# Altium PCB ESP32-S3-WROOM-1-BREAKOUT.PcbDoc
Units mm, origin at the board's own origin, x right, y up, seen from the top; angles counter-clockwise.
Board outline 25.46 x 50.86 mm, 2 copper layers (Top Layer, Bottom Layer), stack 1.57 mm thick; 17 components, 46 nets, 132 pads, 79 vias.
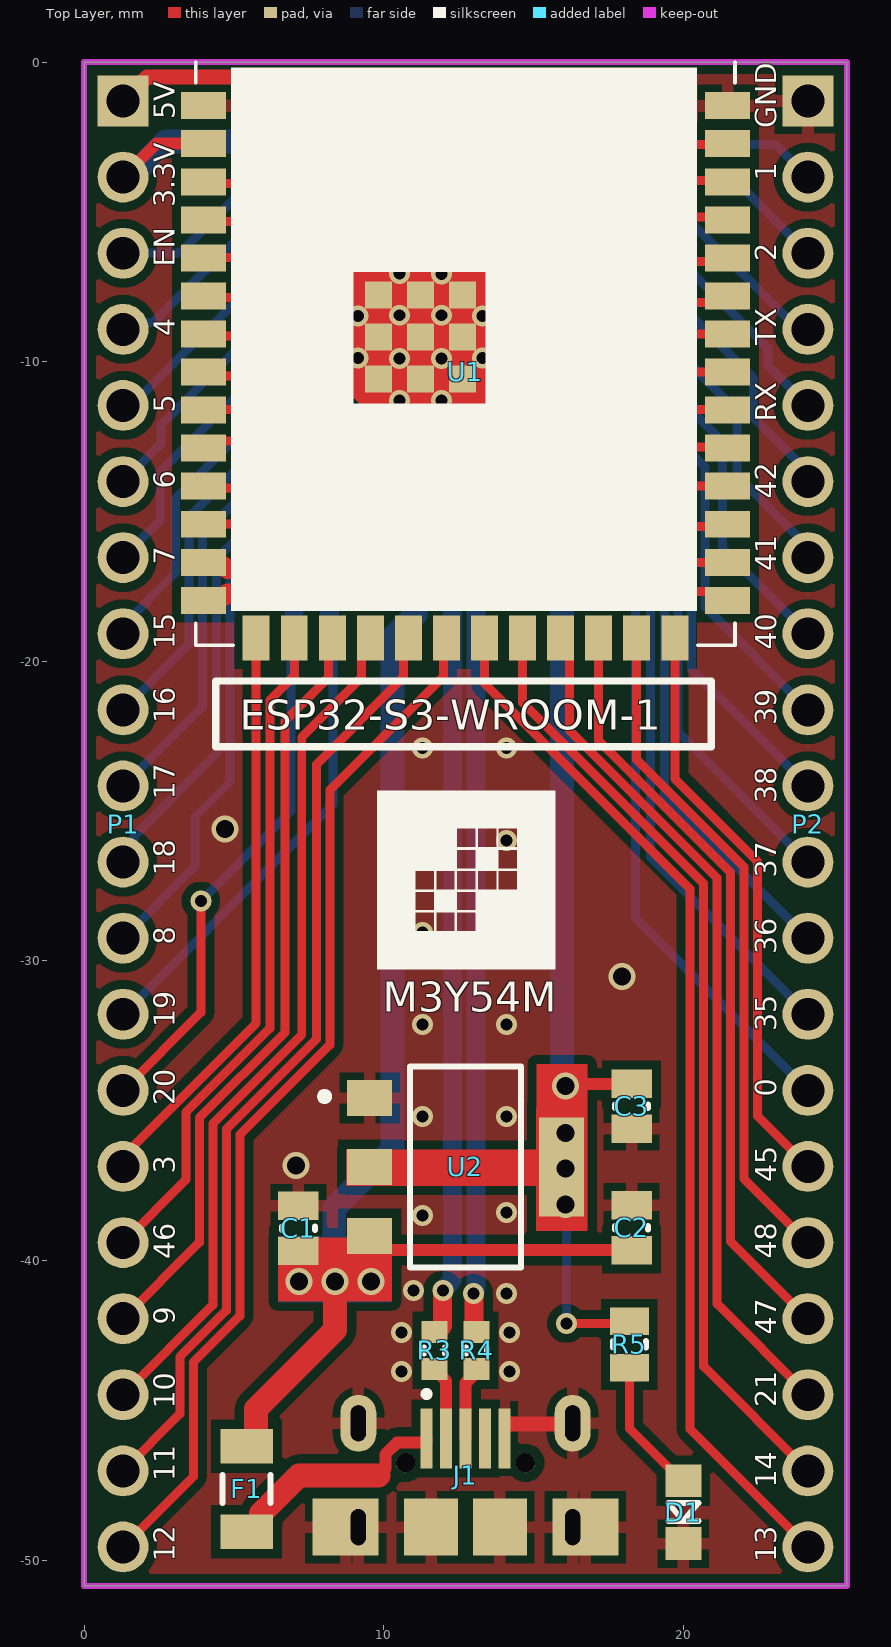
[diagram p0: Top Layer view]
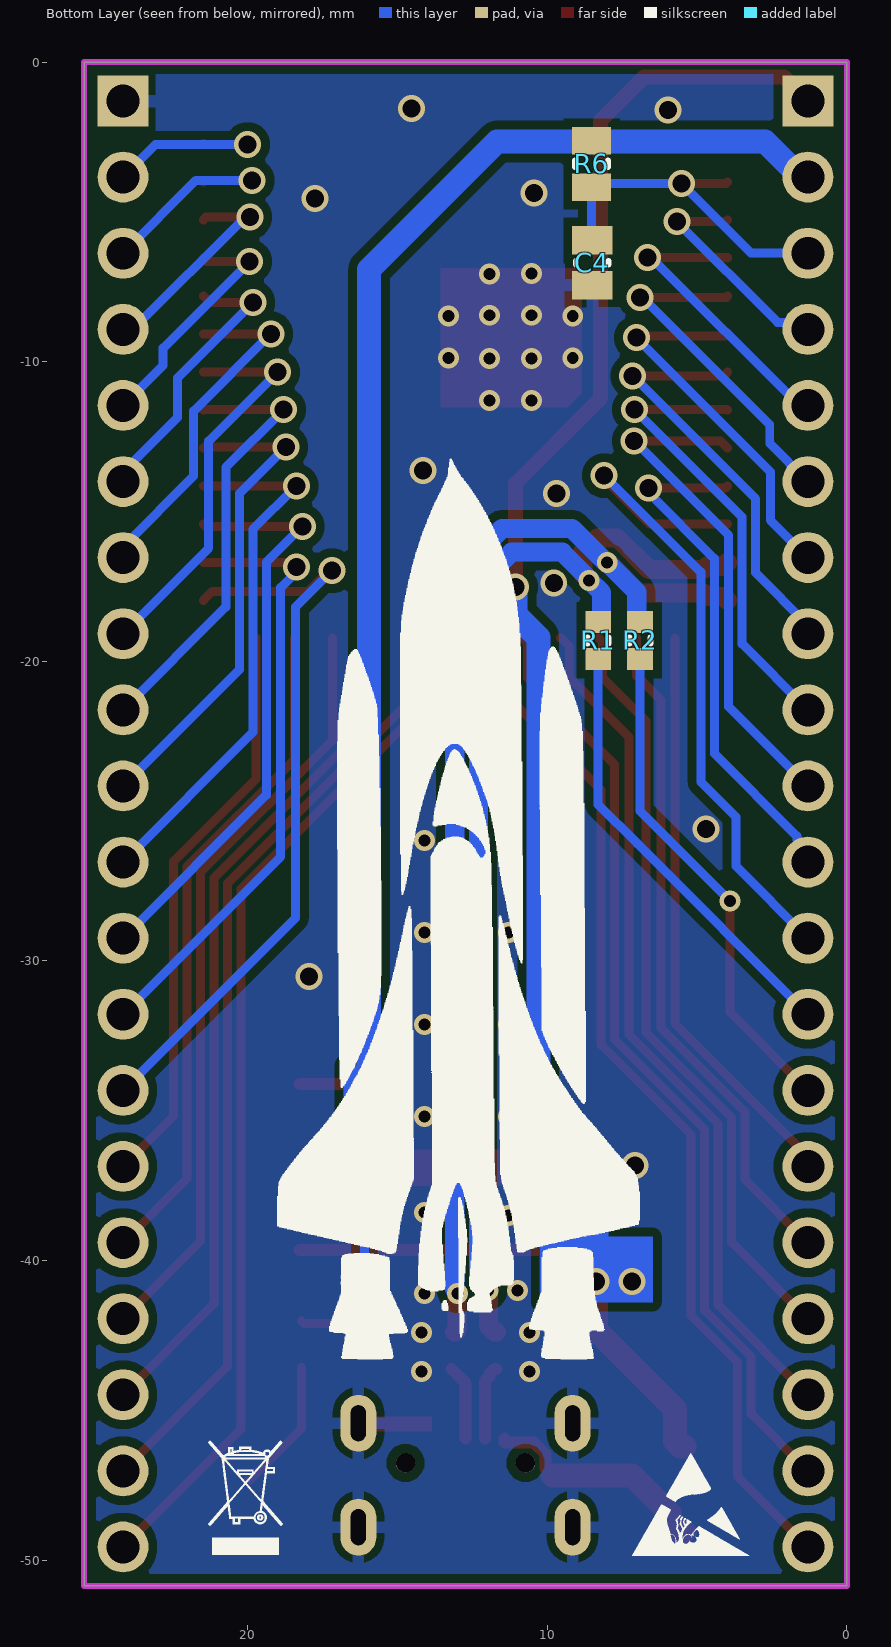
[diagram p1: Bottom Layer view, seen from below]
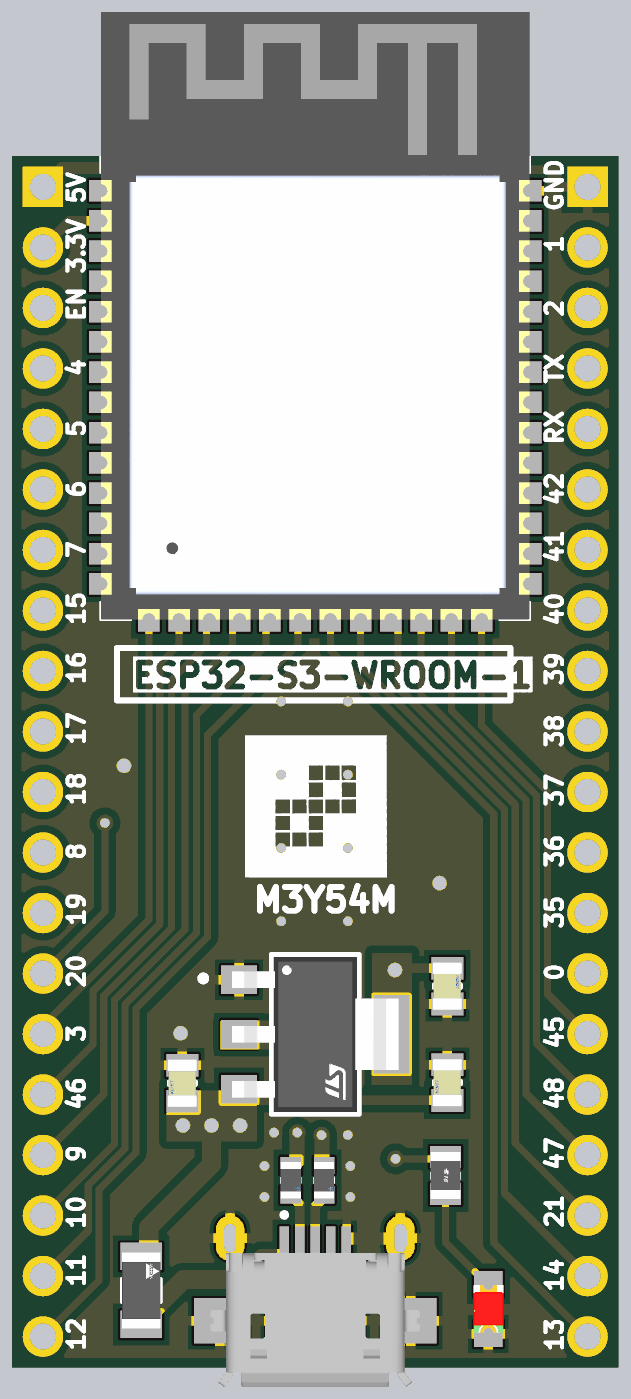
[diagram p2: 3D render of the assembled board from above, using the file's embedded part models]
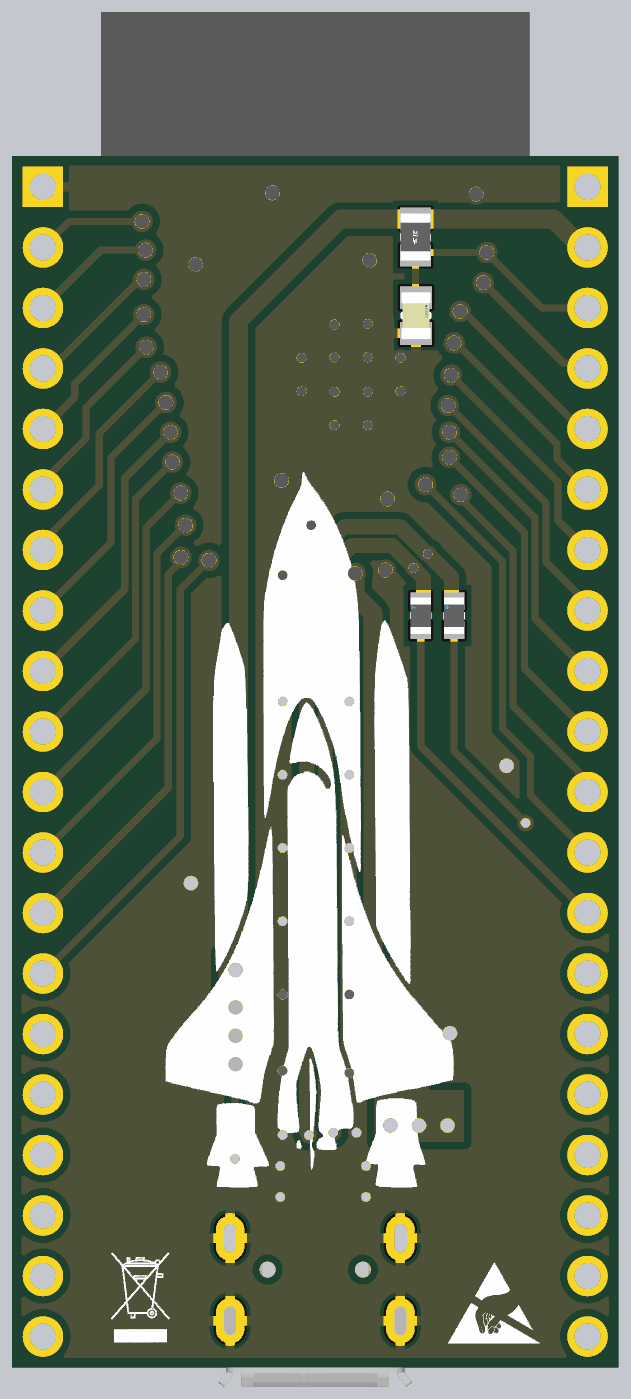
[diagram p3: 3D render of the assembled board from below, using the file's embedded part models]

## Layer stack, top to bottom
Top Solder: solder mask 0.01, Solder Resist, Dk 3.5
Top Layer: signal copper 0.035
Dielectric 1: dielectric 1.5, FR-4, Dk 4.2
Bottom Layer: signal copper 0.035
Bottom Solder: solder mask 0.01, Solder Resist, Dk 3.5

## Board outline
0,-50.86 25.46,-50.86 25.46,0 0,0

## Design rules (kind name [scope] priority, off if disabled: settings)
BoardOutlineClearance [All] p1: gap=0.2 ignorepadtopadclearanceinfootprint=FALSE
Clearance Clearance_Polygon_Fiducials [All vs InComponent('FID?')] p1: gap=1.3 ignorepadtopadclearanceinfootprint=TRUE
Clearance Clearance_Polygon [InPolygon] p2: gap=0.3 ignorepadtopadclearanceinfootprint=TRUE
Clearance [All] p3: gap=0.15 ignorepadtopadclearanceinfootprint=TRUE except(0: Arc-Hole Track-Hole SMDPad-Hole THPad-Hole Via-Hole Fill-Hole Poly-Hole Region-Hole Text-Hole)
DiffPairsRouting [InDifferentialPairClass('USB')] p1: maxlimit=0.15 minlimit=0.15 mostfreqgap=0.15 toplayer_minwidth=0.4 toplayer_maxwidth=0.637 toplayer_prefwidth=0.637 bottomlayer_minwidth=0.4 bottomlayer_maxwidth=0.637 bottomlayer_prefwidth=0.637 impedanceprofiledriven=TRUE impedanceprofileid={1E30ED7A-4480-4550-A02D-2EE5C02F8A02} impedanceprofilevalue=90.000000 maxuncoupledlength=12.7
HoleSize [All] p1: absolutevalues=TRUE maxlimit=3.5 minlimit=0.3 maxpercent=80.000 minpercent=20.000
MatchedLengths [InDifferentialPairClass('USB')] p1: tolerance=25.4 checknetsindiffpair=TRUE checkdiffpairvsdiffpair=FALSE checkxsignals=FALSE checkothers=FALSE usedelayunits=TRUE delaytolerance=100.000000
MinimumSolderMaskSliver [All] p1: minsoldermaskwidth=0.15
PolygonConnect PolygonConnect_Via [IsVia] p1: connectstyle=Direct reliefconductorwidth=0.4 reliefentries=4 polygonreliefangle="90 Angle" airgapwidth=0.25
PolygonConnect [All] p2: connectstyle=Relief reliefconductorwidth=0.4 reliefentries=4 polygonreliefangle="90 Angle" airgapwidth=0.25
RoutingVias [All] p1: holewidth=0.4 width=0.7 viastyle="Through Hole" minholewidth=0.4 minwidth=0.6 maxholewidth=2 maxwidth=3
SilkToSilkClearance [All] p1: silktosilkclearance=0.15
SilkToSolderMaskClearance [IsPad] p1: minsilkscreentomaskgap=0.1 clearancetoexposedcopper=TRUE
SolderMaskExpansion SolderMaskExpansion_Via [IsVia] p1: expansion=0.102 istentingtop=TRUE soldermaskfromhole=TRUE
SolderMaskExpansion [All] p2: expansion=0.102 istentingtop=FALSE
Width [All] p1: maxlimit=2 minlimit=0.25 preferedwidth=0.3
25 further rules are at their usual default settings.

## Classes and differential pairs
differential pair class USB: USB_D
differential pair USB_D: +USB_D_P -USB_D_N

## Components (designator, comment, footprint, x,y, rotation, side; value= is the part's Value field where it differs from the comment)
C1 "C0805C104K5RAC7411" C0805 7.15,-38.925 r90 top value=10uF_50V
C2 "C0805C104K5RAC7411" C0805 18.275,-38.9 r90 top value=100nF_50V
C3 "C0805C104K5RAC7411" C0805 18.275,-34.85 r270 top value=10uF_50V
C4 "C0805C104K5RAC7411" C0805 8.5,-6.7 r270 bottom value=1uF_50V
D1 "LED" LED0805 20,-48.4 r90 top
F1 "NANOSMDC020F-2" R1206 5.425,-47.625 r90 top value=200mA_24V_PTC
J1 "629105150921" CON-MICRO-USB-B-SMD-WITH-HOLDER 12.73,-48.9 r0 top
P1 "CON-HDR-1X20" CON-HDR-1X20-2.54 1.3,-1.3 r270 top
P2 "CON-HDR-1X20" CON-HDR-1X20-2.54 24.16,-1.3 r270 top
R1 "CRG0805F10K" R0603 8.3,-19.3 r90 bottom value=DNP
R2 "CRG0805F10K" R0603 6.9,-19.3 r90 bottom value=DNP
R3 "CRG0805F10K" R0603 11.7,-43 r270 top value=0
R4 "CRG0805F10K" R0603 13.1,-43 r270 top value=0
R5 "CRG0805F10K" R0805 18.2,-42.8 r270 top value=2.2K
R6 "CRG0805F10K" R0805 8.521,-3.4 r90 bottom value=10K
U1 "ESP32-S3-WROOM-1-N4R2" ESP32-S3-WROOM-1_NO-KEEPOUT 12.73,-6.715 r0 top
U2 "AMS1117-3.3" SOT-223 12.73,-36.875 r0 top

## Footprints (in the part's own frame and the unit in brackets; to place one, negate y for a bottom-side part, rotate by r counter-clockwise, add the part's x,y. Pads: shape width x height; smd on the part's side, far side on the other; paste and mask are expansions set on the pad)
C0805 [mm] "FP-C0805C-DN-MFG"
  rect 0.95x1.35 smd: 1(-0.75,0) 2(0.75,0)
  silkscreen extent -0.06,-0.55 0.06,0.55, body extent -1.4,-0.85 1.4,0.85, height 0.25
CON-HDR-1X20-2.54 [mm] "Connector; Header; 20 Position, 2.54 Pitch"
  rect 1.7x1.7 hole 1.1 paste-1000 mask+0: 1(0,0)
  round 1.7 hole 1.1 paste-1000 mask+0: 2(2.54,0) 3(5.08,0) 4(7.62,0) 5(10.16,0) 6(12.7,0) 7(15.24,0) 8(17.78,0) 9(20.32,0) 10(22.86,0) 11(25.4,0) 12(27.94,0) 13(30.48,0) 14(33.02,0) 15(35.56,0) 16(38.1,0) 17(40.64,0) 18(43.18,0) 19(45.72,0) 20(48.26,0)
CON-MICRO-USB-B-SMD-WITH-HOLDER [mm] "MICRO USB 5P female seat B type 7.2 four-pin board foot length 1.3 with column curling"
  rect 0.4x2 smd: 1(-1.3,2.96) 2(-0.65,2.96) 3(0,2.96) 4(0.65,2.96) 5(1.3,2.96)
  rect 2.2x1.9 smd: Shell(-4,0) Shell(4,0)
  oval 1.2x1.9 hole 0.5 slot 1.2 at 90 deg: Shell(-3.575,0) Shell(-3.575,3.47) Shell(3.575,0) Shell(3.575,3.47)
  rect 1.8x1.9 smd: Shell(-1.15,0) Shell(1.15,0)
  round 0.65 hole 0.65 paste+0 mask+0: ""(-2,2.15) ""(2,2.15)
  silkscreen extent -1.4,4.35 -1.2,4.54, body extent -4.4,-2.77 4.4,2.86, height 2.79
ESP32-S3-WROOM-1_NO-KEEPOUT [mm]
  rect 1.5x0.9 smd: 1(-8.75,5.26) 2(-8.75,3.99) 3(-8.75,2.72) 4(-8.75,1.45) 5(-8.75,0.18) 6(-8.75,-1.09) 7(-8.75,-2.36) 8(-8.75,-3.63) 9(-8.75,-4.9) 10(-8.75,-6.17) 11(-8.75,-7.44) 12(-8.75,-8.71) 13(-8.75,-9.98) 14(-8.75,-11.25) 27(8.75,-11.25) 28(8.75,-9.98) 29(8.75,-8.71) 30(8.75,-7.44) 31(8.75,-6.17) 32(8.75,-4.9) 33(8.75,-3.63) 34(8.75,-2.36) 35(8.75,-1.09) 36(8.75,0.18) 37(8.75,1.45) 38(8.75,2.72) 39(8.75,3.99) 40(8.75,5.26)
  rect 0.9x1.5 smd: 15(-6.985,-12.5) 16(-5.715,-12.5) 17(-4.445,-12.5) 18(-3.175,-12.5) 19(-1.905,-12.5) 20(-0.635,-12.5) 21(0.635,-12.5) 22(1.905,-12.5) 23(3.175,-12.5) 24(4.445,-12.5) 25(5.715,-12.5) 26(6.985,-12.5)
  rect 0.9x0.9 smd: 41_1(-1.5,-2.46) 41_2(-2.9,-2.46) 41_3(-0.1,-2.46) 41_4(-2.9,-3.86) 41_5(-1.5,-3.86) 41_6(-0.1,-3.86) 41_7(-2.9,-1.06) 41_8(-1.5,-1.06) 41_9(-0.1,-1.06)
  silkscreen extent -9,-12.75 9,6.7, body extent -9,-12.75 9,12.75, height 3.25
LED0805 [mm]
  rect 1.1x1.2 smd: 1(1.05,0) 2(-1.05,0)
  silkscreen extent -0.3,-0.5 0.3,0.5, body extent -1.7,-0.77 1.7,0.77, height 0.25
R0603 [mm] "FP-CRCW0603-e3-IPC_C"
  rect 0.735x0.862 smd: 1(-0.615,0) 2(0.615,0)
  silkscreen extent -0.1,-0.35 0.1,0.35, body extent -0.77,-0.43 0.77,0.43, height 0.5
R0805 [mm] "FP-CRG0805-IPC_C"
  rect 0.906x1.307 smd: 1(-0.776,0) 2(0.776,0)
  silkscreen extent -0.11,-0.55 0.11,0.55, body extent -1.33,-0.8 1.33,0.8, height 0.25
R1206 [mm] "FP-CRCW1206-e3-IPC_B"
  rect 1.156x1.758 smd: 1(-1.426,0) 2(1.426,0)
  silkscreen extent -0.47,-0.8 0.47,0.8, body extent -2.25,-1.13 2.25,1.13, height 0.25
SOT-223 [mm]
  rect 1.5x1.2 smd: 1(-3.2,2.3) 2(-3.2,0) 3(-3.2,-2.3)
  rect 1.5x3.3 smd: 4(3.2,0)
  silkscreen extent -4.82,-3.35 1.85,3.35, body extent -4.05,-3.45 4.05,3.45, height 0.25

## Part data
C1 C2 C3 C4: library part CAPACITOR, "C0805 0.10 μF X7R 30ppm/°C 10.00% 50 V", Capacitance=100nF, Manufacturer=KEMET, Package=C0805C-DN, Temperature="-55°C to +125°C", Temperature Characteristic=X7R, Temperature Coefficient=30ppm/°C, Temperature Range High=+125°C, Temperature Range Low=-55°C, Tolerance=0.1, Voltage Rating="50 V", Automotive=No, Category=Cap, ComponentLink2Description=Datasheet, ComponentLink2URL=https://content.kemet.com/datasheets/KEM_C1003_C0G_SMD.pdf, Device Class L1="Passive Components", Device Class L2=Capacitors, Device Class L3="Ceramic Capacitors", Height=0.88mm, Ipc Land Pattern Name=CAPC200125X78, Lead Free=Yes, Manufacturer Part Number=C0805C104K5RAC7411, Material=Ceramic, Octopart=https://octopart.com/c0805c104k5rac7411-kemet-18508045, RoHS=TRUE
D1: "Typical LED"
F1: library part FUSE-PTC, "FUSE PPTC 200MA (1206) 24V RESETTABLE"
J1: library part CON-MICRO-USB-AB-RCPT-SMD, "Micro USB 2.0 Type AB Receptacle WR-COM, Horizontal, SMT", Contact Resistance=30mOhm, Manufacturer="Wurth Elektronik", Operating Temperature=-40to85degC, Rated Current=1.8A, Working Voltage=30VAC, Connector Type=MicroUSB2.0TypeAB, Datasheet URL=https://katalog.we-online.de/em/datasheet/629105150921.pdf, Gender=Receptacle, Manufacturer URL=http://www.we-online.de, Mounting Technology=SMT, Orientation=Horizontal, Package Reference=629105150921, Packaging=TapeandReel, Part Number=629105150921, Publisher=WurthElektronik
P1 P2: "Pin Header, 20-Pin", LatestRevisionDate=17-Jul-2002, LatestRevisionNote="Re-released for DXP Platform.", Publisher="Altium Limited"
R1 R2 R3 R4 R5 R6: library part RESISTOR, "RES SMD 10K OHM 1% 1/8W 0805", Case/Package=0805, Max Operating Temperature=125°C, Min Operating Temperature=-55°C, Number of Resistors=1, Power Rating=125mW, Resistor Type="Thick Film", Temperature Coefficient=100ppm/°C, Tolerance=1%, Voltage Rating=150V, Depth=1.25mm, ELV=Compliant, Height=0.55mm, Length=2mm, Mount="Surface Mount", Number of Terminations=2, Packaging="Tape and Reel", Radiation Hardening=No, RoHS Compliant=Yes, Series="CRG Series", Technology="THICK FILM", Termination=Solder
U1: library part ESP32-S3-WROOM-1, "Multiprotocol Modules SMD Module, ESP32-S3R8, 3.3V, 8 MB Octal PSRAM Die, 16 MB Quad SPI Flash, PCB Antenna", MPN=ESP32-S3-WROOM-1-N16R2, Package="Module Espressif Systems", Check_prices=https://www.snapeda.com/parts/ESP32-WROOM-32/Espressif+Systems/view-part/?ref=eda, Digi-Key_Part_Number=1965-ESP32-S3-WROOM-1-N16R2TR-ND, MF="Espressif Systems", Price=3.98, SnapEDA_Link=https://www.snapeda.com/parts/ESP32-WROOM-32/Espressif+Systems/view-part/?ref=snap, Supplier=Digikey, Supplier Link=https://www.digikey.com/en/products/detail/espressif-systems/ESP32-S3-WROOM-1-N16R2/16162644
U2: library part LD1117, "IC REG LINEAR 3.3V 800MA SOT223", Case/Package=SOT-223, Dropout Voltage=1.1V, Input Bias Current=5mA, Max Input Voltage=15V, Max Operating Temperature=125°C, Max Output Current=1.3A, Max Output Voltage=3.3V, Max Power Dissipation=12W, Min Input Voltage=5.3V, Min Operating Temperature=-40°C, Output Current=950mA, Output Voltage Accuracy=1%, Package Quantity=1, Quiescent Current=10mA, Accuracy=1%, Contact Plating=Tin, Height=1.8mm, Lead Free="Lead Free", Length=6.5mm, Max Supply Voltage=15V, Min Output Voltage=3.3V, Min Supply Voltage=3.3V, Mount="Surface Mount", Nominal Output Voltage=3.3V, Number of Outputs=1, Number of Pins=4, Number of Regulators=1, Number of Terminals=4, Output Type=Fixed, Output Voltage=3.3V, Packaging="Tape and Reel", Polarity=Positive, Power Dissipation=12W, Radiation Hardening=No, REACH SVHC="No SVHC", Termination=SMD/SMT, Weight=0.01lb, Width=3.5mm

## Via types
v1: diameter 0.9, hole 0.6, Top Layer to Bottom Layer, tented both sides, 41 vias
v2: diameter 0.7, hole 0.4, Top Layer to Bottom Layer, tented both sides, 38 vias

## Nets (pads, with @x,y where several pads share a name; then routed paths per layer and width w, separated by ;. In a path a pad name is that pad's centre, name@x,y a point inside that pad or via, vN(x,y) a via of type N, cw(c..) or ccw(c..) an arc to the next point about the centre after c; other vN are vias at no path point)
+3V3: C3.1 P1.2 R5.1 R6.2 U1.2 U2.2 U2.4 | length 58.7
  Top Layer w0.3: v2(16.1,-42.1) 18.124,-42.1 R5.1
  Top Layer w0.4: P1.2 2.415,-2.725 U1.2 ; U2.4 15.75,-36.695 15.75,-34.334 15.984,-34.1 C3.1
  Bottom Layer w0.3: v1(16.075,-38.125) 16.1,-38.15 v2(16.1,-42.1)
  Bottom Layer w0.8: P1.2 1.544,-3.84 2.734,-2.65 11.675,-2.65 15.95,-6.925 15.95,-34.05 v1(16.075,-34.175)
  other v1: 16.075,-36.933 16.075,-35.742
+5V: C1.1 C2.1 F1.2 P1.1 U2.3 | length 65.9
  Top Layer w0.4: U2.3 10.005,-39.65 C2.1
  Top Layer w0.5: P1.1 2.1,-0.5 6.775,-0.5 8.225,-1.95 8.225,-11.225 11.056,-14.056 v1(11.056,-17.525)
  Top Layer w0.8: F1.2 5.562,-46.199 5.74,-46.021 5.74,-44.96 8.375,-42.325 v1@8.375,-40.3 ; U2.3@8.88,-39.675 9.38,-39.175 U2.3
  Bottom Layer w0.8: v1@8.35,-40.7 8.35,-38.25 10.3,-36.3 10.3,-19.2 11.056,-18.444 v1(11.056,-17.525)
  other v1: 7.175,-40.7 8.375,-40.7 9.575,-40.7
EN: C4.1 P1.3 R6.1 U1.3 | length 11.6
  Top Layer w0.3: U1.3 4.035,-4.05 v1(5.525,-4.05)
  Bottom Layer w0.3: P1.3 3.195,-6.38 v1(5.525,-4.05) 8.395,-4.05 R6.1 8.521,-5.929 C4.1
GND: C1.2 C2.2 C3.2 C4.2 D1.2 J1.5 J1.Shell P2.1 U1.1 U1.40 U1.41_1 U1.41_2 U1.41_3 U1.41_4 U1.41_5 U1.41_6 U1.41_7 U1.41_8 U1.41_9 U2.1
  other v1: 7.075,-36.825 17.95,-30.525 4.7,-25.6 9.784,-17.384 9.7,-14.4 14.15,-13.625 17.75,-4.55 10.45,-4.375 5.975,-1.6 14.525,-1.55
  other v2: 10.6,-43.7 14.2,-43.7 10.6,-42.4 14.2,-42.4 14.1,-41.1 11,-41 11.3,-38.5 14.1,-38.4 11.3,-35.2 14.1,-35.2 11.3,-32.125 14.1,-32.125 11.3,-29.05 14.1,-29.05 11.3,-25.975 14.1,-25.975 11.3,-22.9 14.1,-22.9 14.1,-17.6 12.9,-15.5 10.525,-11.3 11.925,-11.3 10.525,-9.9 11.925,-9.9 9.15,-9.875 13.3,-9.875 9.15,-8.475 13.3,-8.475 10.525,-8.45 11.925,-8.45 11.925,-7.075 10.525,-7.05
GPIO0: P2.14 U1.27 | length 24.9
  Top Layer w0.3: v1(17.189,-16.975) 17.294,-16.975 17.984,-17.665 21.18,-17.665 U1.27
  Bottom Layer w0.3: v1(17.189,-16.975) 18.4,-18.186 18.4,-28.56 P2.14
GPIO1: P2.2 U1.39 | length 6.1
  Top Layer w0.3: v1(20,-2.75) 21.455,-2.75 U1.39
  Bottom Layer w0.3: v1(20,-2.75) 23.07,-2.75 P2.2
GPIO2: P2.3 U1.38 | length 7
  Top Layer w0.3: v1(19.85,-3.95) 21.435,-3.95 U1.38
  Bottom Layer w0.3: v1(19.85,-3.95) 21.73,-3.95 P2.3
GPIO3: P1.15 U1.15 | length 19.5
  Top Layer w0.3: P1.15 1.3,-36.518 5.745,-32.073 U1.15
GPIO4: P1.4 U1.4 | length 7.6
  Top Layer w0.3: U1.4 4.04,-5.325 v1(5.675,-5.325)
  Bottom Layer w0.3: P1.4 1.529,-8.691 2.309,-8.691 v1(5.675,-5.325)
GPIO5: P1.5 U1.5 | length 10.1
  Top Layer w0.3: U1.5 3.99,-6.525 v1(6.65,-6.525)
  Bottom Layer w0.3: P1.5 1.59,-11.46 6.525,-6.525 v1(6.65,-6.525)
GPIO6: P1.6 U1.6 | length 11.5
  Top Layer w0.3: U1.6 4.025,-7.85 v1(6.9,-7.85)
  Bottom Layer w0.3: P1.6 2.575,-12.725 2.575,-12.1 6.825,-7.85 v1(6.9,-7.85)
GPIO7: P1.7 U1.7 | length 12.8
  Top Layer w0.3: U1.7 4.055,-9.15 6.975,-9.15 v1(7.025,-9.2)
  Bottom Layer w0.3: P1.7 2.55,-15.29 2.55,-13.675 v1(7.025,-9.2)
GPIO8: P1.12 U1.12 | length 23.1
  Top Layer w0.3: U1.12 6.575,-15.425 8.1,-13.9 v1(8.1,-13.8)
  Bottom Layer w0.3: P1.12 3.7,-26.84 3.7,-25.2 4.875,-24.025 4.875,-17.025 v1(8.1,-13.8)
GPIO9: P1.17 U1.17 | length 25.6
  Top Layer w0.3: P1.17 3.85,-39.39 3.85,-35.241 6.7,-32.391 6.7,-22 8.161,-20.539 8.161,-19.339 U1.17
GPIO10: P1.18 U1.18 | length 28.7
  Top Layer w0.3: P1.18 1.3,-44.477 4.3,-41.477 4.3,-35.427 7.265,-32.462 7.265,-22.535 9.255,-20.545 9.255,-19.515 U1.18
GPIO11: P1.19 U1.19 | length 31.8
  Top Layer w0.3: P1.19 3.2,-45.12 3.2,-43.214 4.75,-41.664 4.75,-35.614 7.75,-32.614 7.75,-23.45 10.661,-20.539 10.661,-19.379 U1.19
GPIO12: P1.20 U1.20 | length 34.8
  Top Layer w0.3: P1.20 3.65,-47.21 3.65,-43.4 5.2,-41.85 5.2,-35.8 8.2,-32.8 8.2,-24.3 12,-20.5 12,-19.31 U1.20
GPIO13: P2.20 U1.21 | length 34.8
  Top Layer w0.3: U1.21 13.365,-20.747 20.225,-27.607 20.225,-45.625 P2.20
GPIO14: P2.19 U1.22 | length 31.8
  Top Layer w0.3: U1.22 14.635,-21.381 20.675,-27.421 20.675,-43.535 P2.19
GPIO15: P1.8 U1.8 | length 14.3
  Top Layer w0.3: U1.8 4.11,-10.475 v1(7.15,-10.475)
  Bottom Layer w0.3: P1.8 1.3,-18.789 3.05,-17.039 3.05,-14.575 v1(7.15,-10.475)
GPIO16: P1.9 U1.9 | length 15.5
  Top Layer w0.3: U1.9 4.002,-11.593 v1(7.093,-11.593)
  Bottom Layer w0.3: P1.9 3.5,-19.42 3.5,-15.186 v1(7.093,-11.593)
GPIO17: P1.10 U1.10 | length 17.1
  Top Layer w0.3: U1.10 4.222,-12.643 v1(7.104,-12.643)
  Bottom Layer w0.3: P1.10 3.95,-21.51 3.95,-15.796 v1(7.104,-12.643)
GPIO18: P1.11 U1.11 | length 17.4
  Top Layer w0.3: U1.11 4.045,-14.22 v1(6.62,-14.22)
  Bottom Layer w0.3: P1.11 1.3,-26.321 1.669,-25.952 1.669,-25.831 4.425,-23.075 4.425,-16.575 6.62,-14.38 v1(6.62,-14.22)
GPIO19: P1.13 R1.1 | length 14.8
  Bottom Layer w0.3: P1.13 7,-26.08 8.3,-24.78 R1.1
GPIO20: P1.14 R2.1 | length 16.7
  Top Layer w0.3: P1.14 3.9,-31.72 v2(3.9,-28)
  Bottom Layer w0.3: v2(3.9,-28) 6.9,-25 R2.1
GPIO21: P2.18 U1.23 | length 28.7
  Top Layer w0.3: U1.23 16.205,-19.515 16.205,-22.314 21.125,-27.234 21.125,-41.445 P2.18
GPIO35: P2.13 U1.28 | length 20.5
  Top Layer w0.3: v1(18.368,-16.847) 18.531,-16.847 18.683,-16.695 U1.28
  Bottom Layer w0.3: v1(18.368,-16.847) 18.368,-17.009 18.9,-17.541 18.9,-26.52 P2.13
GPIO36: P2.12 U1.29 | length 19.6
  Top Layer w0.3: v1(18.175,-15.5) 21.405,-15.5 U1.29
  Bottom Layer w0.3: v1(18.175,-15.5) 19.375,-16.7 19.375,-24.455 P2.12
GPIO37: P2.11 U1.30 | length 18.1
  Top Layer w0.3: v1(18.375,-14.15) 21.475,-14.15 U1.30
  Bottom Layer w0.3: v1(18.375,-14.15) 19.825,-15.6 19.825,-22.365 P2.11
GPIO38: P2.10 U1.31 | length 16.3
  Top Layer w0.3: v1(18.725,-12.85) 21.445,-12.85 U1.31
  Bottom Layer w0.3: v1(18.725,-12.85) 20.275,-14.4 20.275,-20.275 P2.10
GPIO39: P2.9 U1.32 | length 14.9
  Top Layer w0.3: v1(18.8,-11.6) 21.465,-11.6 U1.32
  Bottom Layer w0.3: v1(18.8,-11.6) 20.725,-13.525 20.725,-18.185 P2.9
GPIO40: P2.8 U1.33 | length 13.3
  Top Layer w0.3: v1(19,-10.35) 21.475,-10.35 U1.33
  Bottom Layer w0.3: v1(19,-10.35) 21.3,-12.65 21.3,-16.22 P2.8
GPIO41: P2.7 U1.34 | length 11.8
  Top Layer w0.3: v1(19.225,-9.075) U1.34
  Bottom Layer w0.3: v1(19.225,-9.075) 21.8,-11.65 21.8,-13.814 24.16,-16.174 P2.7
GPIO42: P2.6 U1.35 | length 9.5
  Top Layer w0.3: v1(19.825,-8.025) 21.26,-8.025 U1.35
  Bottom Layer w0.3: v1(19.825,-8.025) 22.35,-10.55 22.35,-11.864 24.16,-13.674 P2.6
GPIO45: P2.15 U1.26 | length 19.5
  Top Layer w0.3: U1.26 19.715,-23.915 22.475,-26.675 22.475,-35.175 P2.15
GPIO46: P1.16 U1.16 | length 22.6
  Top Layer w0.3: P1.16 3.4,-37.3 3.4,-35.054 6.2,-32.254 6.2,-21.3 7.015,-20.485 U1.16
GPIO47: P2.17 U1.24 | length 25.6
  Top Layer w0.3: U1.24 17.175,-22.648 21.575,-27.048 21.575,-39.355 P2.17
GPIO48: P2.16 U1.25 | length 22.6
  Top Layer w0.3: U1.25 18.445,-23.281 22.025,-26.861 22.025,-37.265 P2.16
NetD1_1: D1.1 R5.2 | length 4.5
  Top Layer w0.3: R5.2 18.2,-45.6 19.95,-47.35 D1.1
NetF1_1: F1.1 J1.1 | length 7.9
  Top Layer w0.4: 9.828,-47.172 10.055,-46.945 10.055,-46.47 10.45,-46.075 11.43,-46.075 J1.1
  Top Layer w0.8: F1.1 5.726,-49.051 5.904,-48.873 5.904,-48.446 7.178,-47.172 9.828,-47.172
NetJ1_2: J1.2 R3.2 | length 2.5
  Top Layer w0.4: R3.2 11.764,-43.615 11.931,-43.783 11.931,-43.865 12.084,-44.017 12.084,-45.136 12.08,-45.14 J1.2
NetJ1_3: J1.3 R4.2 | length 2.5
  Top Layer w0.4: J1.3 12.73,-44.085 R4.2@13.2,-43.615
RXD0: P2.5 U1.36 | length 8.2
  Top Layer w0.3: v1(19.932,-6.657) 21.358,-6.657 U1.36
  Bottom Layer w0.3: v1(19.932,-6.657) 22.825,-9.55 22.825,-10.125 P2.5
TXD0: P2.4 U1.37 | length 7.4
  Top Layer w0.3: v1(19.925,-5.175) 21.39,-5.175 U1.37
  Bottom Layer w0.3: v1(19.925,-5.175) 20.087,-5.175 23.832,-8.92 P2.4
USB_D_N: R1.2 R3.1 U1.13 | length 38
  Top Layer w0.637: U1.13 4.112,-16.826 4.675,-16.826 4.785,-16.936 6.604,-16.936 7.66,-15.88 8.338,-15.88 8.817,-16.36 8.817,-17.065 8.612,-17.271 8.612,-17.288 v2(8.6,-17.3) ; R3.1 11.764,-42.385 11.963,-42.185 11.963,-41.012 v2(11.975,-41)
  Bottom Layer w0.637: R1.2 8.236,-18.685 8.187,-18.636 8.187,-17.705 8.6,-17.292 v2@8.6,-17.271 ; v2@8.6,-17.255 9.501,-16.355 11.185,-16.355 12.3,-17.47 12.3,-40.63 12.209,-40.722 12.209,-40.749 11.975,-40.983 v2(11.975,-41)
USB_D_P: R2.2 R4.1 U1.14 | length 38.6
  Top Layer w0.637: U1.14 4.112,-17.833 4.675,-17.833 4.785,-17.723 6.93,-17.723 7.923,-16.73 7.967,-16.73 v2(7.999,-16.699) ; v2(12.996,-41.106) 13.008,-41.118 13.008,-42.336 13.057,-42.385 R4.1
  Bottom Layer w0.637: R2.2 6.964,-18.685 7.013,-18.636 7.013,-17.685 8.03,-16.667 8.075,-16.667 9.175,-15.568 11.511,-15.568 13.087,-17.144 13.087,-40.956 12.996,-41.047 v2(12.996,-41.106)
pads on no net: J1. J1.4

## Polygon pours and split planes (outlines as drawn)
GND on Bottom Layer "GND_L02_P001" (solid, remove dead copper, pour order 1): 0,-50.86 25.46,-50.86 25.46,0 0,0
GND on Top Layer "GND_L01_P000" (solid, remove dead copper, pour order 0): 0,-50.86 25.46,-50.86 25.46,0 0,0

## Keep-outs
Keep-Out Layer:
  the board outline again, w0.2

## Other copper
Top Layer:
  rectangle net GND: 13.85,-45.7 15.8,-45.2
  rectangle net +5V: 6.475,-41.375 10.275,-39.225
  region net GND: 13.525,-6.875 13.55,-6.85 13.55,-11.525 9.318,-11.525 8.85,-11.057 8.85,-6.875
  region net +3V3: 8.75,-36.3 15.094,-36.3 15.114,-33.45 16.8,-33.45 16.8,-39 15.094,-39 15.094,-37.5 10.35,-37.5 8.75,-37.5
Bottom Layer:
  rectangle net +5V: 6.475,-41.4 10.25,-39.2
  rectangle net +3V3: 15.3,-38.85 16.8,-33.45

## Silkscreen, mask and mechanical layers (free items; w line width, h text height)
Top Overlay:
  drawing of 9 lines, arcs and shapes, not listed
  text "5V" at 3.03,-1.9 h0.7 r90
  text "GND" at 23.105,-2.215 h0.7 r90
  text "1" at 23.105,-3.955 h0.7 r90
  text "3.3V" at 3.03,-4.847 h0.7 r90
  text "2" at 23.105,-6.655 h0.7 r90
  text "EN" at 3.03,-6.83 h0.7 r90
  text "4" at 3.03,-9.147 h0.7 r90
  text "TX" at 23.105,-9.455 h0.7 r90
  text "5" at 3.03,-11.698 h0.7 r90
  text "RX" at 23.105,-12.01 h0.7 r90
  text "6" at 3.03,-14.242 h0.7 r90
  text "42" at 23.105,-14.57 h0.7 r90
  text "7" at 3.03,-16.783 h0.7 r90
  text "41" at 23.105,-16.995 h0.7 r90
  text "15" at 3.03,-19.59 h0.7 r90
  text "40" at 23.105,-19.62 h0.7 r90
  text "16" at 3.03,-22.073 h0.7 r90
  text "39" at 23.105,-22.128 h0.7 r90
  text "ESP32-S3-WROOM-1" at 5.189,-22.282 h1
  text "17" at 3.03,-24.625 h0.7 r90
  text "38" at 23.105,-24.73 h0.7 r90
  text "18" at 3.03,-27.162 h0.7 r90
  text "37" at 23.105,-27.217 h0.7 r90
  text "8" at 3.03,-29.455 h0.7 r90
  text "36" at 23.105,-29.775 h0.7 r90
  text "M3Y54M" at 9.975,-31.7 h1
  text "19" at 3.03,-32.22 h0.7 r90
  text "35" at 23.105,-32.342 h0.7 r90
  text "0" at 23.105,-34.53 h0.7 r90
  text "20" at 3.03,-34.817 h0.7 r90
  text "3" at 3.03,-37.098 h0.7 r90
  text "45" at 23.105,-37.385 h0.7 r90
  text "48" at 23.105,-39.945 h0.7 r90
  text "46" at 3.03,-39.953 h0.7 r90
  text "9" at 3.03,-42.142 h0.7 r90
  text "47" at 23.105,-42.47 h0.7 r90
  text "21" at 23.105,-44.895 h0.7 r90
  text "10" at 3.03,-44.94 h0.7 r90
  text "11" at 3.03,-47.365 h0.7 r90
  text "14" at 23.105,-47.582 h0.7 r90
  text "12" at 3.03,-50.05 h0.7 r90
  text "13" at 23.105,-50.075 h0.7 r90
Bottom Overlay:
  drawing of 16 lines, arcs and shapes, not listed
Mechanical 1:
  the board outline again, w0.2

## Text inside footprints (layer, text, board x,y; h text height)
J1: Top 3D Body "PCB Edge" at 11.206,-50.678 h0.41